# EAGLE board OpenLog_Panel_v15 (EAGLE 7.5.0), part 1 of 7
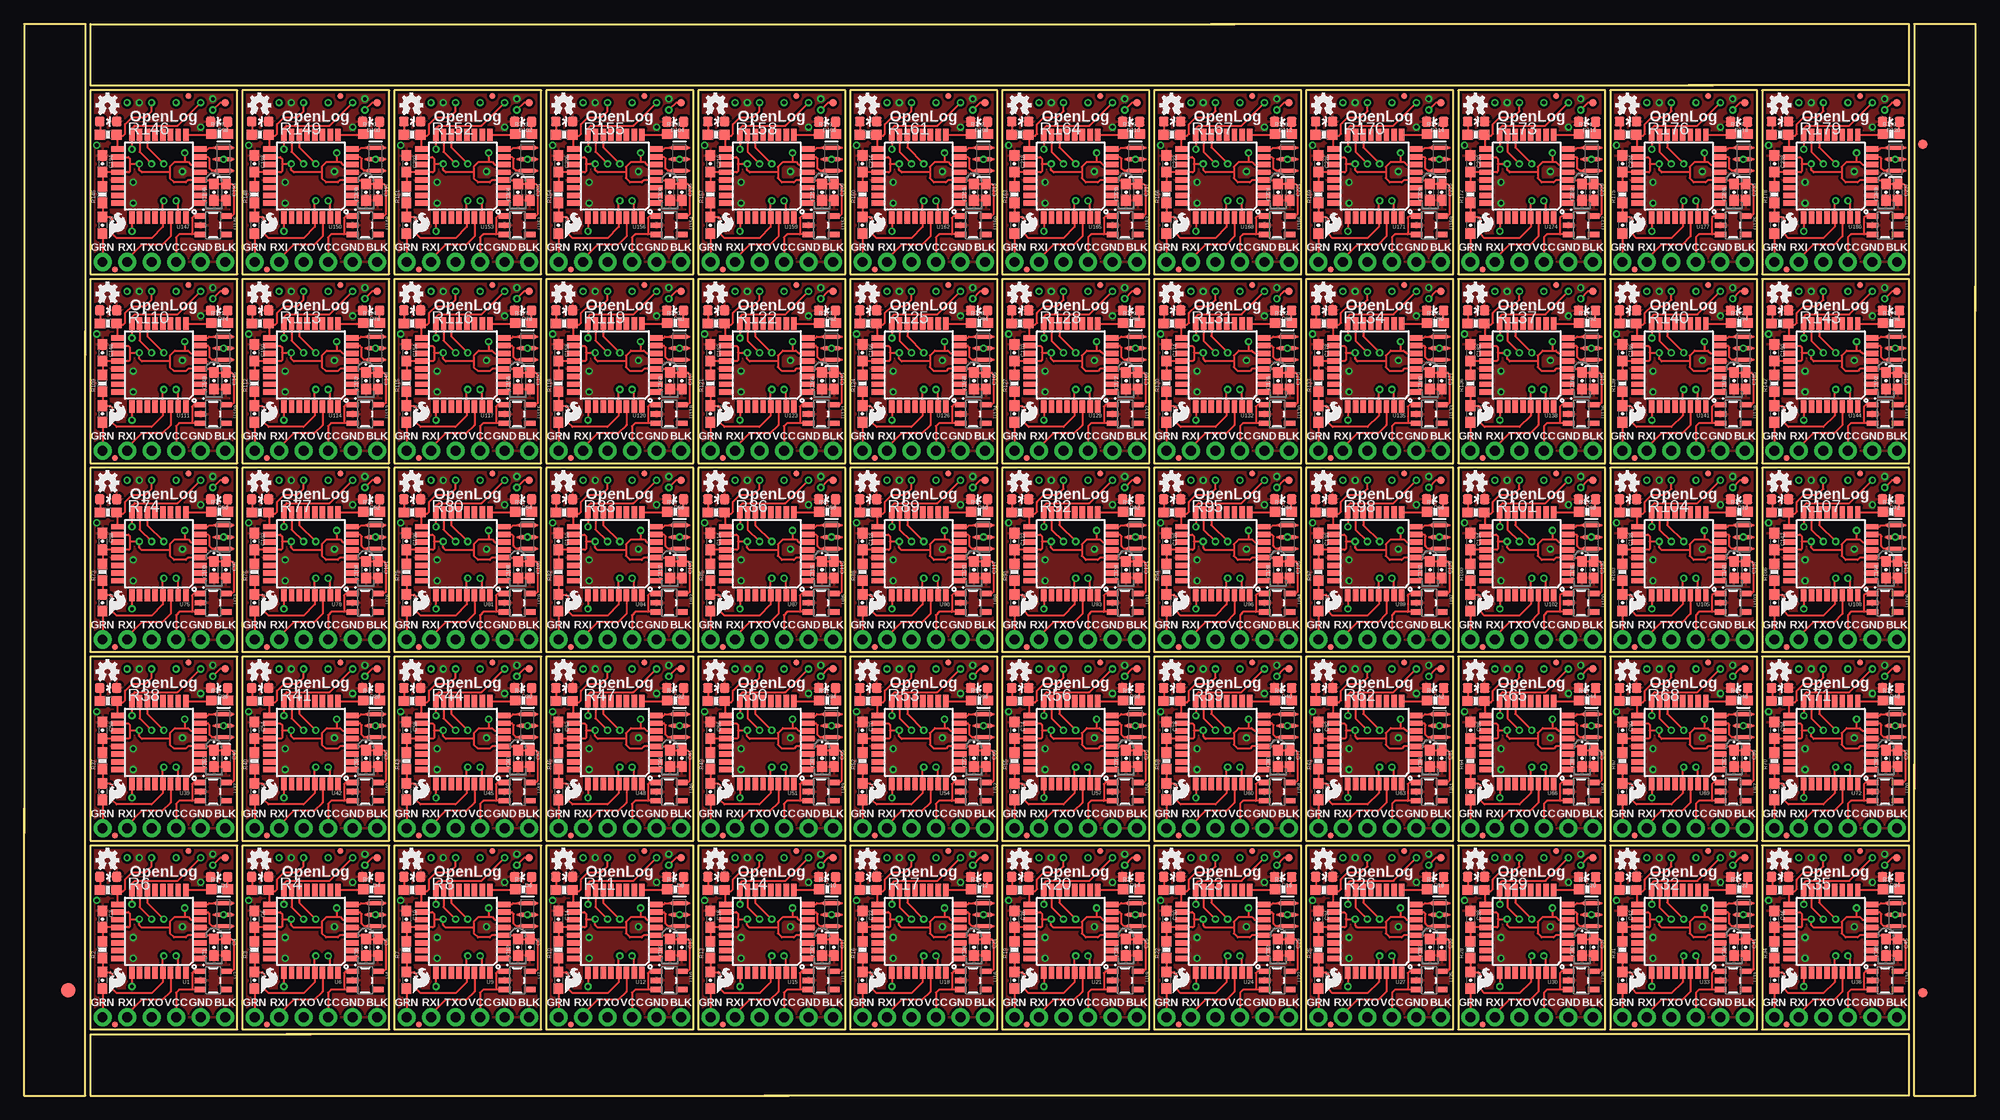
[diagram p0: board, top side]
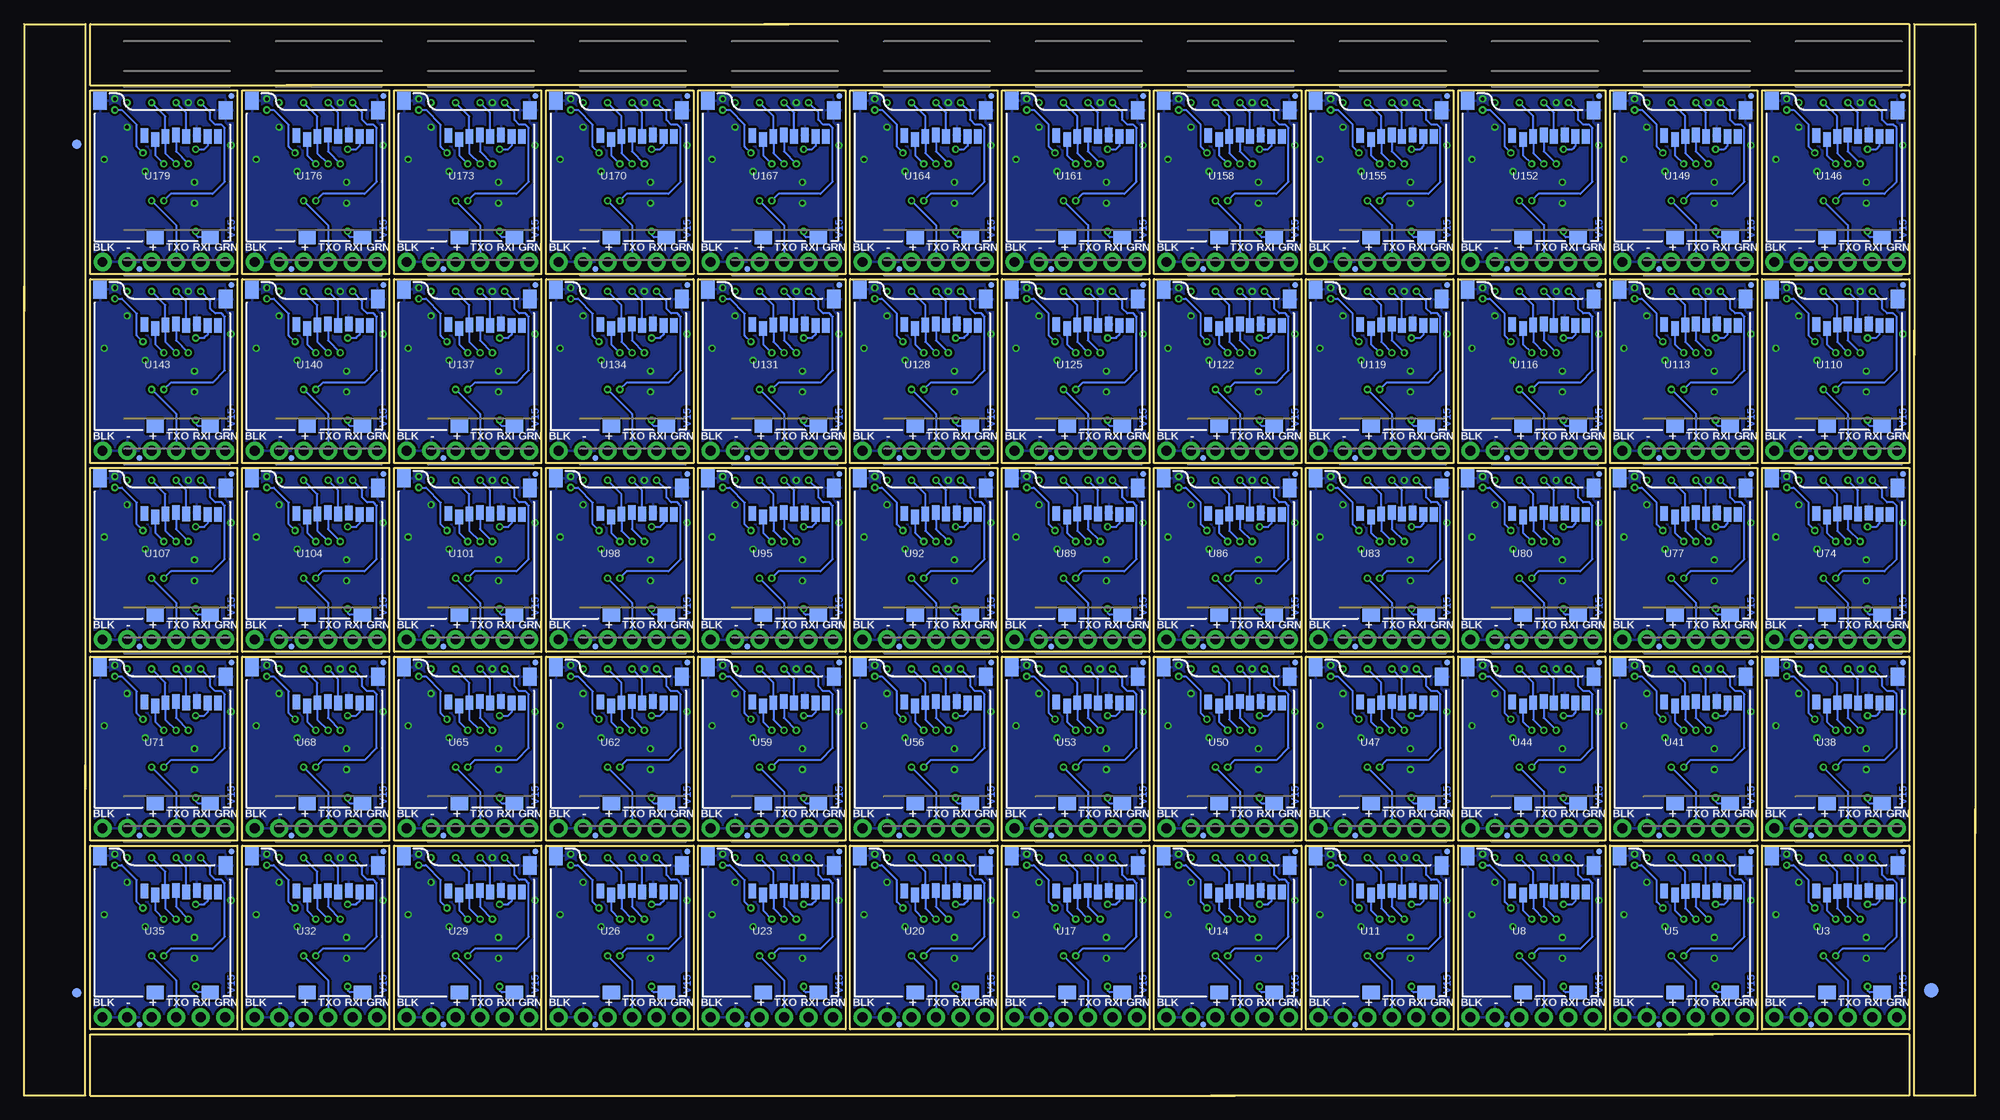
[diagram p1: board, bottom side, seen from below]

Size 202.18 x 111 mm. Coordinates in mm from the lower left corner, seen from the top.
Outline: 264 segments
Copper layers (1*16): Top 0.035mm / dielectric 1.5mm / Bottom 0.035mm
Design rules "SparkFun-2-layer-TIGHT": minimum track width 7mil, minimum drill 15mil, track to track 7mil, track to pad 7mil, pad to pad 7mil, via to via 7mil, smd to smd 7mil, copper to edge 7mil, drill to drill 7mil, minimum pad ring 7mil, minimum via ring 7mil, stop-mask expansion 4mil, vias tented up to drill 20mil, thermal gap 10mil
Net classes: 0 default: width 0.178 mm; 1 vcc: width 0.203 mm

## Footprints (pad centres in the part's own frame; a part is rotated, then mirrored left to right if it is on the bottom)
0603-POL = smd 1.1 x 1: A 0.85,0; K -0.85,0
0603-CAP = smd 1.1 x 1: 1 -0.85,0; 2 0.85,0
LED-0603 = smd 1 x 1: A 0,-0.877; C 0,0.877
FIDUCIAL-1.5X3 = smd 1.5 x 1.5: 1 0,0
FIDUCIAL-1X2 = smd 1 x 1: 1 0,0
MICRO-FIDUCIAL = smd 0.635 x 0.635: 1 0,0
1X06_NO_SILK = drill 1.016 pad 1.88: 1 0,0; 2 2.54,0; 3 5.08,0; 4 7.62,0; 5 10.16,0; 6 12.7,0
RESONATOR-SMD = smd 0.45 x 1.905: 1 -1.2,0; 2 0,0; 3 1.2,0
0603-RES = smd 1.1 x 1: 1 -0.85,0; 2 0.85,0
PAD.03X.03 = smd 0.762 x 0.762: P$1 0,0
TQFP32-08 = smd 1.27 x 0.559: 1 -4.293,2.8; 2 -4.293,2; 3 -4.293,1.2; 4 -4.293,0.4; 5 -4.293,-0.4; 6 -4.293,-1.2; 7 -4.293,-2; 8 -4.293,-2.8; 17 4.293,-2.8; 18 4.293,-2; 19 4.293,-1.2; 20 4.293,-0.4; 21 4.293,0.4; 22 4.293,1.2; 23 4.293,2; 24 4.293,2.8 | smd 0.559 x 1.27: 9 -2.8,-4.293; 10 -2,-4.293; 11 -1.2,-4.293; 12 -0.4,-4.293; 13 0.4,-4.293; 14 1.2,-4.293; 15 2,-4.293; 16 2.8,-4.293; 25 2.8,4.293; 26 2,4.293; 27 1.2,4.293; 28 0.4,4.293; 29 -0.4,4.293; 30 -1.2,4.293; 31 -2,4.293; 32 -2.8,4.293
SOT23-5 = smd 0.55 x 1.2: 1 -0.95,-1.3; 2 0,-1.3; 3 0.95,-1.3; 4 0.95,1.3; 5 -0.95,1.3
MICROSD_1:1 = smd 0.8 x 1.5: 1 5.096,10.919; 2 6.218,10.519; 3 7.274,10.853; 4 8.367,10.982; 5 9.421,10.828; 6 10.539,10.973; 7 11.648,10.819; 8 12.721,10.819 | smd 1.8 x 1.4: CD1 11.92,0.4; CD2 6.22,0.4 | smd 1.4 x 1.9: GND1 0.497,14.55; GND3 13.52,13.55

## Placement (x,y rotation side)
C1  10uF  [0603-POL]  19.68,15.37 90 top
C2  0.1uF  [0603-CAP]  8.13,11.94 270 top
C3  0.1uF  [0603-CAP]  8.13,18.29 270 top
C4  0.1uF  [0603-CAP]  20.9,15.37 270 top
C5  0.1uF  [0603-CAP]  36.65,15.37 270 top
C6  0.1uF  [0603-CAP]  23.88,18.29 270 top
C7  0.1uF  [0603-CAP]  23.88,11.94 270 top
C8  10uF  [0603-POL]  35.43,15.37 90 top
C9  0.1uF  [0603-CAP]  52.4,15.37 270 top
C10  0.1uF  [0603-CAP]  39.62,18.29 270 top
C11  0.1uF  [0603-CAP]  39.62,11.94 270 top
C12  10uF  [0603-POL]  51.18,15.37 90 top
C13  0.1uF  [0603-CAP]  68.15,15.37 270 top
C14  0.1uF  [0603-CAP]  55.37,18.29 270 top
C15  0.1uF  [0603-CAP]  55.37,11.94 270 top
C16  10uF  [0603-POL]  66.93,15.37 90 top
C17  0.1uF  [0603-CAP]  83.9,15.37 270 top
C18  0.1uF  [0603-CAP]  71.12,18.29 270 top
C19  0.1uF  [0603-CAP]  71.12,11.94 270 top
C20  10uF  [0603-POL]  82.68,15.37 90 top
C21  0.1uF  [0603-CAP]  99.64,15.37 270 top
C22  0.1uF  [0603-CAP]  86.87,18.29 270 top
C23  0.1uF  [0603-CAP]  86.87,11.94 270 top
C24  10uF  [0603-POL]  98.42,15.37 90 top
C25  0.1uF  [0603-CAP]  115.39,15.37 270 top
C26  0.1uF  [0603-CAP]  102.62,18.29 270 top
C27  0.1uF  [0603-CAP]  102.62,11.94 270 top
C28  10uF  [0603-POL]  114.17,15.37 90 top
C29  0.1uF  [0603-CAP]  131.14,15.37 270 top
C30  0.1uF  [0603-CAP]  118.36,18.29 270 top
C31  0.1uF  [0603-CAP]  118.36,11.94 270 top
C32  10uF  [0603-POL]  129.92,15.37 90 top
C33  0.1uF  [0603-CAP]  146.89,15.37 270 top
C34  0.1uF  [0603-CAP]  134.11,18.29 270 top
C35  0.1uF  [0603-CAP]  134.11,11.94 270 top
C36  10uF  [0603-POL]  145.67,15.37 90 top
C37  0.1uF  [0603-CAP]  162.64,15.37 270 top
C38  0.1uF  [0603-CAP]  149.86,18.29 270 top
C39  0.1uF  [0603-CAP]  149.86,11.94 270 top
C40  10uF  [0603-POL]  161.42,15.37 90 top
C41  0.1uF  [0603-CAP]  178.38,15.37 270 top
C42  0.1uF  [0603-CAP]  165.61,18.29 270 top
C43  0.1uF  [0603-CAP]  165.61,11.94 270 top
C44  10uF  [0603-POL]  177.16,15.37 90 top
C45  0.1uF  [0603-CAP]  194.13,15.37 270 top
C46  0.1uF  [0603-CAP]  181.36,18.29 270 top
C47  0.1uF  [0603-CAP]  181.36,11.94 270 top
C48  10uF  [0603-POL]  192.91,15.37 90 top
C49  0.1uF  [0603-CAP]  20.9,34.92 270 top
C50  0.1uF  [0603-CAP]  8.13,37.85 270 top
C51  0.1uF  [0603-CAP]  8.13,31.5 270 top
C52  10uF  [0603-POL]  19.68,34.92 90 top
C53  0.1uF  [0603-CAP]  36.65,34.92 270 top
C54  0.1uF  [0603-CAP]  23.88,37.85 270 top
C55  0.1uF  [0603-CAP]  23.88,31.5 270 top
C56  10uF  [0603-POL]  35.43,34.92 90 top
C57  0.1uF  [0603-CAP]  52.4,34.92 270 top
C58  0.1uF  [0603-CAP]  39.62,37.85 270 top
C59  0.1uF  [0603-CAP]  39.62,31.5 270 top
C60  10uF  [0603-POL]  51.18,34.92 90 top
C61  0.1uF  [0603-CAP]  68.15,34.92 270 top
C62  0.1uF  [0603-CAP]  55.37,37.85 270 top
C63  0.1uF  [0603-CAP]  55.37,31.5 270 top
C64  10uF  [0603-POL]  66.93,34.92 90 top
C65  0.1uF  [0603-CAP]  83.9,34.92 270 top
C66  0.1uF  [0603-CAP]  71.12,37.85 270 top
C67  0.1uF  [0603-CAP]  71.12,31.5 270 top
C68  10uF  [0603-POL]  82.68,34.92 90 top
C69  0.1uF  [0603-CAP]  99.64,34.92 270 top
C70  0.1uF  [0603-CAP]  86.87,37.85 270 top
C71  0.1uF  [0603-CAP]  86.87,31.5 270 top
C72  10uF  [0603-POL]  98.42,34.92 90 top
C73  0.1uF  [0603-CAP]  115.39,34.92 270 top
C74  0.1uF  [0603-CAP]  102.62,37.85 270 top
C75  0.1uF  [0603-CAP]  102.62,31.5 270 top
C76  10uF  [0603-POL]  114.17,34.92 90 top
C77  0.1uF  [0603-CAP]  131.14,34.92 270 top
C78  0.1uF  [0603-CAP]  118.36,37.85 270 top
C79  0.1uF  [0603-CAP]  118.36,31.5 270 top
C80  10uF  [0603-POL]  129.92,34.92 90 top
C81  0.1uF  [0603-CAP]  146.89,34.92 270 top
C82  0.1uF  [0603-CAP]  134.11,37.85 270 top
C83  0.1uF  [0603-CAP]  134.11,31.5 270 top
C84  10uF  [0603-POL]  145.67,34.92 90 top
C85  0.1uF  [0603-CAP]  162.64,34.92 270 top
C86  0.1uF  [0603-CAP]  149.86,37.85 270 top
C87  0.1uF  [0603-CAP]  149.86,31.5 270 top
C88  10uF  [0603-POL]  161.42,34.92 90 top
C89  0.1uF  [0603-CAP]  178.38,34.92 270 top
C90  0.1uF  [0603-CAP]  165.61,37.85 270 top
C91  0.1uF  [0603-CAP]  165.61,31.5 270 top
C92  10uF  [0603-POL]  177.16,34.92 90 top
C93  0.1uF  [0603-CAP]  194.13,34.92 270 top
C94  0.1uF  [0603-CAP]  181.36,37.85 270 top
C95  0.1uF  [0603-CAP]  181.36,31.5 270 top
C96  10uF  [0603-POL]  192.91,34.92 90 top
C97  0.1uF  [0603-CAP]  20.9,54.48 270 top
C98  0.1uF  [0603-CAP]  8.13,57.4 270 top
C99  0.1uF  [0603-CAP]  8.13,51.05 270 top
C100  10uF  [0603-POL]  19.68,54.48 90 top
C101  0.1uF  [0603-CAP]  36.65,54.48 270 top
C102  0.1uF  [0603-CAP]  23.88,57.4 270 top
C103  0.1uF  [0603-CAP]  23.88,51.05 270 top
C104  10uF  [0603-POL]  35.43,54.48 90 top
C105  0.1uF  [0603-CAP]  52.4,54.48 270 top
C106  0.1uF  [0603-CAP]  39.62,57.4 270 top
C107  0.1uF  [0603-CAP]  39.62,51.05 270 top
C108  10uF  [0603-POL]  51.18,54.48 90 top
C109  0.1uF  [0603-CAP]  68.15,54.48 270 top
C110  0.1uF  [0603-CAP]  55.37,57.4 270 top
C111  0.1uF  [0603-CAP]  55.37,51.05 270 top
C112  10uF  [0603-POL]  66.93,54.48 90 top
C113  0.1uF  [0603-CAP]  83.9,54.48 270 top
C114  0.1uF  [0603-CAP]  71.12,57.4 270 top
C115  0.1uF  [0603-CAP]  71.12,51.05 270 top
C116  10uF  [0603-POL]  82.68,54.48 90 top
C117  0.1uF  [0603-CAP]  99.64,54.48 270 top
C118  0.1uF  [0603-CAP]  86.87,57.4 270 top
C119  0.1uF  [0603-CAP]  86.87,51.05 270 top
C120  10uF  [0603-POL]  98.42,54.48 90 top
C121  0.1uF  [0603-CAP]  115.39,54.48 270 top
C122  0.1uF  [0603-CAP]  102.62,57.4 270 top
C123  0.1uF  [0603-CAP]  102.62,51.05 270 top
C124  10uF  [0603-POL]  114.17,54.48 90 top
C125  0.1uF  [0603-CAP]  131.14,54.48 270 top
C126  0.1uF  [0603-CAP]  118.36,57.4 270 top
C127  0.1uF  [0603-CAP]  118.36,51.05 270 top
C128  10uF  [0603-POL]  129.92,54.48 90 top
C129  0.1uF  [0603-CAP]  146.89,54.48 270 top
C130  0.1uF  [0603-CAP]  134.11,57.4 270 top
C131  0.1uF  [0603-CAP]  134.11,51.05 270 top
C132  10uF  [0603-POL]  145.67,54.48 90 top
C133  0.1uF  [0603-CAP]  162.64,54.48 270 top
C134  0.1uF  [0603-CAP]  149.86,57.4 270 top
C135  0.1uF  [0603-CAP]  149.86,51.05 270 top
C136  10uF  [0603-POL]  161.42,54.48 90 top
C137  0.1uF  [0603-CAP]  178.38,54.48 270 top
C138  0.1uF  [0603-CAP]  165.61,57.4 270 top
C139  0.1uF  [0603-CAP]  165.61,51.05 270 top
C140  10uF  [0603-POL]  177.16,54.48 90 top
C141  0.1uF  [0603-CAP]  194.13,54.48 270 top
C142  0.1uF  [0603-CAP]  181.36,57.4 270 top
C143  0.1uF  [0603-CAP]  181.36,51.05 270 top
C144  10uF  [0603-POL]  192.91,54.48 90 top
C145  0.1uF  [0603-CAP]  20.9,74.04 270 top
C146  0.1uF  [0603-CAP]  8.13,76.96 270 top
C147  0.1uF  [0603-CAP]  8.13,70.61 270 top
C148  10uF  [0603-POL]  19.68,74.04 90 top
C149  0.1uF  [0603-CAP]  36.65,74.04 270 top
C150  0.1uF  [0603-CAP]  23.88,76.96 270 top
C151  0.1uF  [0603-CAP]  23.88,70.61 270 top
C152  10uF  [0603-POL]  35.43,74.04 90 top
C153  0.1uF  [0603-CAP]  52.4,74.04 270 top
C154  0.1uF  [0603-CAP]  39.62,76.96 270 top
C155  0.1uF  [0603-CAP]  39.62,70.61 270 top
C156  10uF  [0603-POL]  51.18,74.04 90 top
C157  0.1uF  [0603-CAP]  68.15,74.04 270 top
C158  0.1uF  [0603-CAP]  55.37,76.96 270 top
C159  0.1uF  [0603-CAP]  55.37,70.61 270 top
C160  10uF  [0603-POL]  66.93,74.04 90 top
C161  0.1uF  [0603-CAP]  83.9,74.04 270 top
C162  0.1uF  [0603-CAP]  71.12,76.96 270 top
C163  0.1uF  [0603-CAP]  71.12,70.61 270 top
C164  10uF  [0603-POL]  82.68,74.04 90 top
C165  0.1uF  [0603-CAP]  99.64,74.04 270 top
C166  0.1uF  [0603-CAP]  86.87,76.96 270 top
C167  0.1uF  [0603-CAP]  86.87,70.61 270 top
C168  10uF  [0603-POL]  98.42,74.04 90 top
C169  0.1uF  [0603-CAP]  115.39,74.04 270 top
C170  0.1uF  [0603-CAP]  102.62,76.96 270 top
C171  0.1uF  [0603-CAP]  102.62,70.61 270 top
C172  10uF  [0603-POL]  114.17,74.04 90 top
C173  0.1uF  [0603-CAP]  131.14,74.04 270 top
C174  0.1uF  [0603-CAP]  118.36,76.96 270 top
C175  0.1uF  [0603-CAP]  118.36,70.61 270 top
C176  10uF  [0603-POL]  129.92,74.04 90 top
C177  0.1uF  [0603-CAP]  146.89,74.04 270 top
C178  0.1uF  [0603-CAP]  134.11,76.96 270 top
C179  0.1uF  [0603-CAP]  134.11,70.61 270 top
C180  10uF  [0603-POL]  145.67,74.04 90 top
C181  0.1uF  [0603-CAP]  162.64,74.04 270 top
C182  0.1uF  [0603-CAP]  149.86,76.96 270 top
C183  0.1uF  [0603-CAP]  149.86,70.61 270 top
C184  10uF  [0603-POL]  161.42,74.04 90 top
C185  0.1uF  [0603-CAP]  178.38,74.04 270 top
C186  0.1uF  [0603-CAP]  165.61,76.96 270 top
C187  0.1uF  [0603-CAP]  165.61,70.61 270 top
C188  10uF  [0603-POL]  177.16,74.04 90 top
C189  0.1uF  [0603-CAP]  194.13,74.04 270 top
C190  0.1uF  [0603-CAP]  181.36,76.96 270 top
C191  0.1uF  [0603-CAP]  181.36,70.61 270 top
C192  10uF  [0603-POL]  192.91,74.04 90 top
C193  0.1uF  [0603-CAP]  20.9,93.6 270 top
C194  0.1uF  [0603-CAP]  8.13,96.52 270 top
C195  0.1uF  [0603-CAP]  8.13,90.17 270 top
C196  10uF  [0603-POL]  19.68,93.6 90 top
C197  0.1uF  [0603-CAP]  36.65,93.6 270 top
C198  0.1uF  [0603-CAP]  23.88,96.52 270 top
C199  0.1uF  [0603-CAP]  23.88,90.17 270 top
C200  10uF  [0603-POL]  35.43,93.6 90 top
C201  0.1uF  [0603-CAP]  52.4,93.6 270 top
C202  0.1uF  [0603-CAP]  39.62,96.52 270 top
C203  0.1uF  [0603-CAP]  39.62,90.17 270 top
C204  10uF  [0603-POL]  51.18,93.6 90 top
C205  0.1uF  [0603-CAP]  68.15,93.6 270 top
C206  0.1uF  [0603-CAP]  55.37,96.52 270 top
C207  0.1uF  [0603-CAP]  55.37,90.17 270 top
C208  10uF  [0603-POL]  66.93,93.6 90 top
C209  0.1uF  [0603-CAP]  83.9,93.6 270 top
C210  0.1uF  [0603-CAP]  71.12,96.52 270 top
C211  0.1uF  [0603-CAP]  71.12,90.17 270 top
C212  10uF  [0603-POL]  82.68,93.6 90 top
C213  0.1uF  [0603-CAP]  99.64,93.6 270 top
C214  0.1uF  [0603-CAP]  86.87,96.52 270 top
C215  0.1uF  [0603-CAP]  86.87,90.17 270 top
C216  10uF  [0603-POL]  98.42,93.6 90 top
C217  0.1uF  [0603-CAP]  115.39,93.6 270 top
C218  0.1uF  [0603-CAP]  102.62,96.52 270 top
C219  0.1uF  [0603-CAP]  102.62,90.17 270 top
C220  10uF  [0603-POL]  114.17,93.6 90 top
C221  0.1uF  [0603-CAP]  131.14,93.6 270 top
C222  0.1uF  [0603-CAP]  118.36,96.52 270 top
C223  0.1uF  [0603-CAP]  118.36,90.17 270 top
C224  10uF  [0603-POL]  129.92,93.6 90 top
C225  0.1uF  [0603-CAP]  146.89,93.6 270 top
C226  0.1uF  [0603-CAP]  134.11,96.52 270 top
C227  0.1uF  [0603-CAP]  134.11,90.17 270 top
C228  10uF  [0603-POL]  145.67,93.6 90 top
C229  0.1uF  [0603-CAP]  162.64,93.6 270 top
C230  0.1uF  [0603-CAP]  149.86,96.52 270 top
C231  0.1uF  [0603-CAP]  149.86,90.17 270 top
C232  10uF  [0603-POL]  161.42,93.6 90 top
C233  0.1uF  [0603-CAP]  178.38,93.6 270 top
C234  0.1uF  [0603-CAP]  165.61,96.52 270 top
C235  0.1uF  [0603-CAP]  165.61,90.17 270 top
C236  10uF  [0603-POL]  177.16,93.6 90 top
C237  0.1uF  [0603-CAP]  194.13,93.6 270 top
C238  0.1uF  [0603-CAP]  181.36,96.52 270 top
C239  0.1uF  [0603-CAP]  181.36,90.17 270 top
C240  10uF  [0603-POL]  192.91,93.6 90 top
D1  BLUE  [LED-0603]  20.22,22.66 90 top
D2  GREEN  [LED-0603]  24.47,22.67 270 top
D3  GREEN  [LED-0603]  8.72,22.67 270 top
D4  BLUE  [LED-0603]  35.97,22.66 90 top
D5  GREEN  [LED-0603]  40.22,22.67 270 top
D6  BLUE  [LED-0603]  51.71,22.66 90 top
D7  GREEN  [LED-0603]  55.96,22.67 270 top
D8  BLUE  [LED-0603]  67.46,22.66 90 top
D9  GREEN  [LED-0603]  71.71,22.67 270 top
D10  BLUE  [LED-0603]  83.21,22.66 90 top
D11  GREEN  [LED-0603]  87.46,22.67 270 top
D12  BLUE  [LED-0603]  98.96,22.66 90 top
D13  GREEN  [LED-0603]  103.21,22.67 270 top
D14  BLUE  [LED-0603]  114.71,22.66 90 top
D15  GREEN  [LED-0603]  118.96,22.67 270 top
D16  BLUE  [LED-0603]  130.45,22.66 90 top
D17  GREEN  [LED-0603]  134.7,22.67 270 top
D18  BLUE  [LED-0603]  146.2,22.66 90 top
D19  GREEN  [LED-0603]  150.45,22.67 270 top
D20  BLUE  [LED-0603]  161.95,22.66 90 top
D21  GREEN  [LED-0603]  166.2,22.67 270 top
D22  BLUE  [LED-0603]  177.7,22.66 90 top
D23  GREEN  [LED-0603]  181.95,22.67 270 top
D24  BLUE  [LED-0603]  193.45,22.66 90 top
D25  GREEN  [LED-0603]  8.72,42.23 270 top
D26  BLUE  [LED-0603]  20.22,42.21 90 top
D27  GREEN  [LED-0603]  24.47,42.23 270 top
D28  BLUE  [LED-0603]  35.97,42.21 90 top
D29  GREEN  [LED-0603]  40.22,42.23 270 top
D30  BLUE  [LED-0603]  51.71,42.21 90 top
D31  GREEN  [LED-0603]  55.96,42.23 270 top
D32  BLUE  [LED-0603]  67.46,42.21 90 top
D33  GREEN  [LED-0603]  71.71,42.23 270 top
D34  BLUE  [LED-0603]  83.21,42.21 90 top
D35  GREEN  [LED-0603]  87.46,42.23 270 top
D36  BLUE  [LED-0603]  98.96,42.21 90 top
D37  GREEN  [LED-0603]  103.21,42.23 270 top
D38  BLUE  [LED-0603]  114.71,42.21 90 top
D39  GREEN  [LED-0603]  118.96,42.23 270 top
D40  BLUE  [LED-0603]  130.45,42.21 90 top
D41  GREEN  [LED-0603]  134.7,42.23 270 top
D42  BLUE  [LED-0603]  146.2,42.21 90 top
D43  GREEN  [LED-0603]  150.45,42.23 270 top
D44  BLUE  [LED-0603]  161.95,42.21 90 top
D45  GREEN  [LED-0603]  166.2,42.23 270 top
D46  BLUE  [LED-0603]  177.7,42.21 90 top
D47  GREEN  [LED-0603]  181.95,42.23 270 top
D48  BLUE  [LED-0603]  193.45,42.21 90 top
D49  GREEN  [LED-0603]  8.72,61.79 270 top
D50  BLUE  [LED-0603]  20.22,61.77 90 top
D51  GREEN  [LED-0603]  24.47,61.79 270 top
D52  BLUE  [LED-0603]  35.97,61.77 90 top
D53  GREEN  [LED-0603]  40.22,61.79 270 top
D54  BLUE  [LED-0603]  51.71,61.77 90 top
D55  GREEN  [LED-0603]  55.96,61.79 270 top
D56  BLUE  [LED-0603]  67.46,61.77 90 top
D57  GREEN  [LED-0603]  71.71,61.79 270 top
D58  BLUE  [LED-0603]  83.21,61.77 90 top
D59  GREEN  [LED-0603]  87.46,61.79 270 top
D60  BLUE  [LED-0603]  98.96,61.77 90 top
D61  GREEN  [LED-0603]  103.21,61.79 270 top
D62  BLUE  [LED-0603]  114.71,61.77 90 top
D63  GREEN  [LED-0603]  118.96,61.79 270 top
D64  BLUE  [LED-0603]  130.45,61.77 90 top
D65  GREEN  [LED-0603]  134.7,61.79 270 top
D66  BLUE  [LED-0603]  146.2,61.77 90 top
D67  GREEN  [LED-0603]  150.45,61.79 270 top
D68  BLUE  [LED-0603]  161.95,61.77 90 top
D69  GREEN  [LED-0603]  166.2,61.79 270 top
D70  BLUE  [LED-0603]  177.7,61.77 90 top
D71  GREEN  [LED-0603]  181.95,61.79 270 top
D72  BLUE  [LED-0603]  193.45,61.77 90 top
D73  GREEN  [LED-0603]  8.72,81.35 270 top
D74  BLUE  [LED-0603]  20.22,81.33 90 top
D75  GREEN  [LED-0603]  24.47,81.35 270 top
D76  BLUE  [LED-0603]  35.97,81.33 90 top
D77  GREEN  [LED-0603]  40.22,81.35 270 top
D78  BLUE  [LED-0603]  51.71,81.33 90 top
D79  GREEN  [LED-0603]  55.96,81.35 270 top
D80  BLUE  [LED-0603]  67.46,81.33 90 top
D81  GREEN  [LED-0603]  71.71,81.35 270 top
D82  BLUE  [LED-0603]  83.21,81.33 90 top
D83  GREEN  [LED-0603]  87.46,81.35 270 top
D84  BLUE  [LED-0603]  98.96,81.33 90 top
D85  GREEN  [LED-0603]  103.21,81.35 270 top
D86  BLUE  [LED-0603]  114.71,81.33 90 top
D87  GREEN  [LED-0603]  118.96,81.35 270 top
D88  BLUE  [LED-0603]  130.45,81.33 90 top
D89  GREEN  [LED-0603]  134.7,81.35 270 top
D90  BLUE  [LED-0603]  146.2,81.33 90 top
D91  GREEN  [LED-0603]  150.45,81.35 270 top
D92  BLUE  [LED-0603]  161.95,81.33 90 top
D93  GREEN  [LED-0603]  166.2,81.35 270 top
D94  BLUE  [LED-0603]  177.7,81.33 90 top
D95  GREEN  [LED-0603]  181.95,81.35 270 top
D96  BLUE  [LED-0603]  193.45,81.33 90 top
D97  GREEN  [LED-0603]  8.72,100.9 270 top
D98  BLUE  [LED-0603]  20.22,100.89 90 top
D99  GREEN  [LED-0603]  24.47,100.9 270 top
D100  BLUE  [LED-0603]  35.97,100.89 90 top
D101  GREEN  [LED-0603]  40.22,100.9 270 top
D102  BLUE  [LED-0603]  51.71,100.89 90 top
D103  GREEN  [LED-0603]  55.96,100.9 270 top
D104  BLUE  [LED-0603]  67.46,100.89 90 top
D105  GREEN  [LED-0603]  71.71,100.9 270 top
D106  BLUE  [LED-0603]  83.21,100.89 90 top
D107  GREEN  [LED-0603]  87.46,100.9 270 top
D108  BLUE  [LED-0603]  98.96,100.89 90 top
D109  GREEN  [LED-0603]  103.21,100.9 270 top
D110  BLUE  [LED-0603]  114.71,100.89 90 top
D111  GREEN  [LED-0603]  118.96,100.9 270 top
D112  BLUE  [LED-0603]  130.45,100.89 90 top
D113  GREEN  [LED-0603]  134.7,100.9 270 top
D114  BLUE  [LED-0603]  146.2,100.89 90 top
D115  GREEN  [LED-0603]  150.45,100.9 270 top
D116  BLUE  [LED-0603]  161.95,100.89 90 top
D117  GREEN  [LED-0603]  166.2,100.9 270 top
D118  BLUE  [LED-0603]  177.7,100.89 90 top
D119  GREEN  [LED-0603]  181.95,100.9 270 top
D120  BLUE  [LED-0603]  193.45,100.89 90 top
E$1  [FIDUCIAL-1.5X3]  4.57,10.92 0 top
E$2  [FIDUCIAL-1.5X3]  4.57,10.92 0 bottom
E$3  [FIDUCIAL-1X2]  196.72,10.67 0 bottom
E$4  [FIDUCIAL-1X2]  196.72,98.55 180 bottom
E$7  [FIDUCIAL-1X2]  196.72,98.55 180 top
E$8  [FIDUCIAL-1X2]  196.72,10.67 0 top
FID1  FIDUCIALUFIDUCIAL  [MICRO-FIDUCIAL]  17.02,25.32 0 top
FID2  FIDUCIALUFIDUCIAL  [MICRO-FIDUCIAL]  9.4,7.37 0 top
FID3  FIDUCIALUFIDUCIAL  [MICRO-FIDUCIAL]  17.02,7.39 0 bottom
FID4  FIDUCIALUFIDUCIAL  [MICRO-FIDUCIAL]  7.49,25.3 0 bottom
FID5  FIDUCIALUFIDUCIAL  [MICRO-FIDUCIAL]  32.77,25.32 0 top
FID6  FIDUCIALUFIDUCIAL  [MICRO-FIDUCIAL]  25.15,7.37 0 top
FID7  FIDUCIALUFIDUCIAL  [MICRO-FIDUCIAL]  32.77,7.39 0 bottom
FID8  FIDUCIALUFIDUCIAL  [MICRO-FIDUCIAL]  23.24,25.3 0 bottom
FID9  FIDUCIALUFIDUCIAL  [MICRO-FIDUCIAL]  48.51,25.32 0 top
FID10  FIDUCIALUFIDUCIAL  [MICRO-FIDUCIAL]  40.89,7.37 0 top
FID11  FIDUCIALUFIDUCIAL  [MICRO-FIDUCIAL]  48.51,7.39 0 bottom
FID12  FIDUCIALUFIDUCIAL  [MICRO-FIDUCIAL]  38.99,25.3 0 bottom
FID13  FIDUCIALUFIDUCIAL  [MICRO-FIDUCIAL]  64.26,25.32 0 top
FID14  FIDUCIALUFIDUCIAL  [MICRO-FIDUCIAL]  56.64,7.37 0 top
FID15  FIDUCIALUFIDUCIAL  [MICRO-FIDUCIAL]  64.26,7.39 0 bottom
FID16  FIDUCIALUFIDUCIAL  [MICRO-FIDUCIAL]  54.74,25.3 0 bottom
FID17  FIDUCIALUFIDUCIAL  [MICRO-FIDUCIAL]  80.01,25.32 0 top
FID18  FIDUCIALUFIDUCIAL  [MICRO-FIDUCIAL]  72.39,7.37 0 top
FID19  FIDUCIALUFIDUCIAL  [MICRO-FIDUCIAL]  80.01,7.39 0 bottom
FID20  FIDUCIALUFIDUCIAL  [MICRO-FIDUCIAL]  70.48,25.3 0 bottom
FID21  FIDUCIALUFIDUCIAL  [MICRO-FIDUCIAL]  95.76,25.32 0 top
FID22  FIDUCIALUFIDUCIAL  [MICRO-FIDUCIAL]  88.14,7.37 0 top
FID23  FIDUCIALUFIDUCIAL  [MICRO-FIDUCIAL]  95.76,7.39 0 bottom
FID24  FIDUCIALUFIDUCIAL  [MICRO-FIDUCIAL]  86.23,25.3 0 bottom
FID25  FIDUCIALUFIDUCIAL  [MICRO-FIDUCIAL]  111.51,25.32 0 top
FID26  FIDUCIALUFIDUCIAL  [MICRO-FIDUCIAL]  103.89,7.37 0 top
FID27  FIDUCIALUFIDUCIAL  [MICRO-FIDUCIAL]  111.51,7.39 0 bottom
FID28  FIDUCIALUFIDUCIAL  [MICRO-FIDUCIAL]  101.98,25.3 0 bottom
FID29  FIDUCIALUFIDUCIAL  [MICRO-FIDUCIAL]  127.25,25.32 0 top
FID30  FIDUCIALUFIDUCIAL  [MICRO-FIDUCIAL]  119.63,7.37 0 top
FID31  FIDUCIALUFIDUCIAL  [MICRO-FIDUCIAL]  127.25,7.39 0 bottom
FID32  FIDUCIALUFIDUCIAL  [MICRO-FIDUCIAL]  117.73,25.3 0 bottom
FID33  FIDUCIALUFIDUCIAL  [MICRO-FIDUCIAL]  143,25.32 0 top
FID34  FIDUCIALUFIDUCIAL  [MICRO-FIDUCIAL]  135.38,7.37 0 top
FID35  FIDUCIALUFIDUCIAL  [MICRO-FIDUCIAL]  143,7.39 0 bottom
FID36  FIDUCIALUFIDUCIAL  [MICRO-FIDUCIAL]  133.48,25.3 0 bottom
FID37  FIDUCIALUFIDUCIAL  [MICRO-FIDUCIAL]  158.75,25.32 0 top
FID38  FIDUCIALUFIDUCIAL  [MICRO-FIDUCIAL]  151.13,7.37 0 top
FID39  FIDUCIALUFIDUCIAL  [MICRO-FIDUCIAL]  158.75,7.39 0 bottom
FID40  FIDUCIALUFIDUCIAL  [MICRO-FIDUCIAL]  149.22,25.3 0 bottom
FID41  FIDUCIALUFIDUCIAL  [MICRO-FIDUCIAL]  174.5,25.32 0 top
FID42  FIDUCIALUFIDUCIAL  [MICRO-FIDUCIAL]  166.88,7.37 0 top
FID43  FIDUCIALUFIDUCIAL  [MICRO-FIDUCIAL]  174.5,7.39 0 bottom
FID44  FIDUCIALUFIDUCIAL  [MICRO-FIDUCIAL]  164.97,25.3 0 bottom
FID45  FIDUCIALUFIDUCIAL  [MICRO-FIDUCIAL]  190.25,25.32 0 top
FID46  FIDUCIALUFIDUCIAL  [MICRO-FIDUCIAL]  182.63,7.37 0 top
FID47  FIDUCIALUFIDUCIAL  [MICRO-FIDUCIAL]  190.25,7.39 0 bottom
FID48  FIDUCIALUFIDUCIAL  [MICRO-FIDUCIAL]  180.72,25.3 0 bottom
FID49  FIDUCIALUFIDUCIAL  [MICRO-FIDUCIAL]  17.02,44.88 0 top
FID50  FIDUCIALUFIDUCIAL  [MICRO-FIDUCIAL]  9.4,26.92 0 top
FID51  FIDUCIALUFIDUCIAL  [MICRO-FIDUCIAL]  17.02,26.95 0 bottom
FID52  FIDUCIALUFIDUCIAL  [MICRO-FIDUCIAL]  7.49,44.86 0 bottom
FID53  FIDUCIALUFIDUCIAL  [MICRO-FIDUCIAL]  32.77,44.88 0 top
FID54  FIDUCIALUFIDUCIAL  [MICRO-FIDUCIAL]  25.15,26.92 0 top
FID55  FIDUCIALUFIDUCIAL  [MICRO-FIDUCIAL]  32.77,26.95 0 bottom
FID56  FIDUCIALUFIDUCIAL  [MICRO-FIDUCIAL]  23.24,44.86 0 bottom
FID57  FIDUCIALUFIDUCIAL  [MICRO-FIDUCIAL]  48.51,44.88 0 top
FID58  FIDUCIALUFIDUCIAL  [MICRO-FIDUCIAL]  40.89,26.92 0 top
FID59  FIDUCIALUFIDUCIAL  [MICRO-FIDUCIAL]  48.51,26.95 0 bottom
FID60  FIDUCIALUFIDUCIAL  [MICRO-FIDUCIAL]  38.99,44.86 0 bottom
FID61  FIDUCIALUFIDUCIAL  [MICRO-FIDUCIAL]  64.26,44.88 0 top
FID62  FIDUCIALUFIDUCIAL  [MICRO-FIDUCIAL]  56.64,26.92 0 top
FID63  FIDUCIALUFIDUCIAL  [MICRO-FIDUCIAL]  64.26,26.95 0 bottom
FID64  FIDUCIALUFIDUCIAL  [MICRO-FIDUCIAL]  54.74,44.86 0 bottom
FID65  FIDUCIALUFIDUCIAL  [MICRO-FIDUCIAL]  80.01,44.88 0 top
FID66  FIDUCIALUFIDUCIAL  [MICRO-FIDUCIAL]  72.39,26.92 0 top
FID67  FIDUCIALUFIDUCIAL  [MICRO-FIDUCIAL]  80.01,26.95 0 bottom
FID68  FIDUCIALUFIDUCIAL  [MICRO-FIDUCIAL]  70.48,44.86 0 bottom
FID69  FIDUCIALUFIDUCIAL  [MICRO-FIDUCIAL]  95.76,44.88 0 top
FID70  FIDUCIALUFIDUCIAL  [MICRO-FIDUCIAL]  88.14,26.92 0 top
FID71  FIDUCIALUFIDUCIAL  [MICRO-FIDUCIAL]  95.76,26.95 0 bottom
FID72  FIDUCIALUFIDUCIAL  [MICRO-FIDUCIAL]  86.23,44.86 0 bottom
FID73  FIDUCIALUFIDUCIAL  [MICRO-FIDUCIAL]  111.51,44.88 0 top
FID74  FIDUCIALUFIDUCIAL  [MICRO-FIDUCIAL]  103.89,26.92 0 top
FID75  FIDUCIALUFIDUCIAL  [MICRO-FIDUCIAL]  111.51,26.95 0 bottom
FID76  FIDUCIALUFIDUCIAL  [MICRO-FIDUCIAL]  101.98,44.86 0 bottom
FID77  FIDUCIALUFIDUCIAL  [MICRO-FIDUCIAL]  127.25,44.88 0 top
FID78  FIDUCIALUFIDUCIAL  [MICRO-FIDUCIAL]  119.63,26.92 0 top
FID79  FIDUCIALUFIDUCIAL  [MICRO-FIDUCIAL]  127.25,26.95 0 bottom
FID80  FIDUCIALUFIDUCIAL  [MICRO-FIDUCIAL]  117.73,44.86 0 bottom
FID81  FIDUCIALUFIDUCIAL  [MICRO-FIDUCIAL]  143,44.88 0 top
FID82  FIDUCIALUFIDUCIAL  [MICRO-FIDUCIAL]  135.38,26.92 0 top
FID83  FIDUCIALUFIDUCIAL  [MICRO-FIDUCIAL]  143,26.95 0 bottom
FID84  FIDUCIALUFIDUCIAL  [MICRO-FIDUCIAL]  133.48,44.86 0 bottom
FID85  FIDUCIALUFIDUCIAL  [MICRO-FIDUCIAL]  158.75,44.88 0 top
FID86  FIDUCIALUFIDUCIAL  [MICRO-FIDUCIAL]  151.13,26.92 0 top
FID87  FIDUCIALUFIDUCIAL  [MICRO-FIDUCIAL]  158.75,26.95 0 bottom
FID88  FIDUCIALUFIDUCIAL  [MICRO-FIDUCIAL]  149.22,44.86 0 bottom
FID89  FIDUCIALUFIDUCIAL  [MICRO-FIDUCIAL]  174.5,44.88 0 top
FID90  FIDUCIALUFIDUCIAL  [MICRO-FIDUCIAL]  166.88,26.92 0 top
FID91  FIDUCIALUFIDUCIAL  [MICRO-FIDUCIAL]  174.5,26.95 0 bottom
FID92  FIDUCIALUFIDUCIAL  [MICRO-FIDUCIAL]  164.97,44.86 0 bottom
FID93  FIDUCIALUFIDUCIAL  [MICRO-FIDUCIAL]  190.25,44.88 0 top
FID94  FIDUCIALUFIDUCIAL  [MICRO-FIDUCIAL]  182.63,26.92 0 top
FID95  FIDUCIALUFIDUCIAL  [MICRO-FIDUCIAL]  190.25,26.95 0 bottom
FID96  FIDUCIALUFIDUCIAL  [MICRO-FIDUCIAL]  180.72,44.86 0 bottom
FID97  FIDUCIALUFIDUCIAL  [MICRO-FIDUCIAL]  17.02,64.44 0 top
FID98  FIDUCIALUFIDUCIAL  [MICRO-FIDUCIAL]  9.4,46.48 0 top
FID99  FIDUCIALUFIDUCIAL  [MICRO-FIDUCIAL]  17.02,46.51 0 bottom
FID100  FIDUCIALUFIDUCIAL  [MICRO-FIDUCIAL]  7.49,64.41 0 bottom
FID101  FIDUCIALUFIDUCIAL  [MICRO-FIDUCIAL]  32.77,64.44 0 top
FID102  FIDUCIALUFIDUCIAL  [MICRO-FIDUCIAL]  25.15,46.48 0 top
FID103  FIDUCIALUFIDUCIAL  [MICRO-FIDUCIAL]  32.77,46.51 0 bottom
FID104  FIDUCIALUFIDUCIAL  [MICRO-FIDUCIAL]  23.24,64.41 0 bottom
FID105  FIDUCIALUFIDUCIAL  [MICRO-FIDUCIAL]  48.51,64.44 0 top
FID106  FIDUCIALUFIDUCIAL  [MICRO-FIDUCIAL]  40.89,46.48 0 top
FID107  FIDUCIALUFIDUCIAL  [MICRO-FIDUCIAL]  48.51,46.51 0 bottom
FID108  FIDUCIALUFIDUCIAL  [MICRO-FIDUCIAL]  38.99,64.41 0 bottom
FID109  FIDUCIALUFIDUCIAL  [MICRO-FIDUCIAL]  64.26,64.44 0 top
FID110  FIDUCIALUFIDUCIAL  [MICRO-FIDUCIAL]  56.64,46.48 0 top
FID111  FIDUCIALUFIDUCIAL  [MICRO-FIDUCIAL]  64.26,46.51 0 bottom
FID112  FIDUCIALUFIDUCIAL  [MICRO-FIDUCIAL]  54.74,64.41 0 bottom
FID113  FIDUCIALUFIDUCIAL  [MICRO-FIDUCIAL]  80.01,64.44 0 top
FID114  FIDUCIALUFIDUCIAL  [MICRO-FIDUCIAL]  72.39,46.48 0 top
FID115  FIDUCIALUFIDUCIAL  [MICRO-FIDUCIAL]  80.01,46.51 0 bottom
FID116  FIDUCIALUFIDUCIAL  [MICRO-FIDUCIAL]  70.48,64.41 0 bottom
FID117  FIDUCIALUFIDUCIAL  [MICRO-FIDUCIAL]  95.76,64.44 0 top
FID118  FIDUCIALUFIDUCIAL  [MICRO-FIDUCIAL]  88.14,46.48 0 top
FID119  FIDUCIALUFIDUCIAL  [MICRO-FIDUCIAL]  95.76,46.51 0 bottom
FID120  FIDUCIALUFIDUCIAL  [MICRO-FIDUCIAL]  86.23,64.41 0 bottom
FID121  FIDUCIALUFIDUCIAL  [MICRO-FIDUCIAL]  111.51,64.44 0 top
FID122  FIDUCIALUFIDUCIAL  [MICRO-FIDUCIAL]  103.89,46.48 0 top
FID123  FIDUCIALUFIDUCIAL  [MICRO-FIDUCIAL]  111.51,46.51 0 bottom
FID124  FIDUCIALUFIDUCIAL  [MICRO-FIDUCIAL]  101.98,64.41 0 bottom
FID125  FIDUCIALUFIDUCIAL  [MICRO-FIDUCIAL]  127.25,64.44 0 top
FID126  FIDUCIALUFIDUCIAL  [MICRO-FIDUCIAL]  119.63,46.48 0 top
FID127  FIDUCIALUFIDUCIAL  [MICRO-FIDUCIAL]  127.25,46.51 0 bottom
FID128  FIDUCIALUFIDUCIAL  [MICRO-FIDUCIAL]  117.73,64.41 0 bottom
FID129  FIDUCIALUFIDUCIAL  [MICRO-FIDUCIAL]  143,64.44 0 top
FID130  FIDUCIALUFIDUCIAL  [MICRO-FIDUCIAL]  135.38,46.48 0 top
FID131  FIDUCIALUFIDUCIAL  [MICRO-FIDUCIAL]  143,46.51 0 bottom
FID132  FIDUCIALUFIDUCIAL  [MICRO-FIDUCIAL]  133.48,64.41 0 bottom
FID133  FIDUCIALUFIDUCIAL  [MICRO-FIDUCIAL]  158.75,64.44 0 top
FID134  FIDUCIALUFIDUCIAL  [MICRO-FIDUCIAL]  151.13,46.48 0 top
FID135  FIDUCIALUFIDUCIAL  [MICRO-FIDUCIAL]  158.75,46.51 0 bottom
FID136  FIDUCIALUFIDUCIAL  [MICRO-FIDUCIAL]  149.22,64.41 0 bottom
FID137  FIDUCIALUFIDUCIAL  [MICRO-FIDUCIAL]  174.5,64.44 0 top
FID138  FIDUCIALUFIDUCIAL  [MICRO-FIDUCIAL]  166.88,46.48 0 top
FID139  FIDUCIALUFIDUCIAL  [MICRO-FIDUCIAL]  174.5,46.51 0 bottom
FID140  FIDUCIALUFIDUCIAL  [MICRO-FIDUCIAL]  164.97,64.41 0 bottom
FID141  FIDUCIALUFIDUCIAL  [MICRO-FIDUCIAL]  190.25,64.44 0 top
FID142  FIDUCIALUFIDUCIAL  [MICRO-FIDUCIAL]  182.63,46.48 0 top
FID143  FIDUCIALUFIDUCIAL  [MICRO-FIDUCIAL]  190.25,46.51 0 bottom
FID144  FIDUCIALUFIDUCIAL  [MICRO-FIDUCIAL]  180.72,64.41 0 bottom
FID145  FIDUCIALUFIDUCIAL  [MICRO-FIDUCIAL]  17.02,84 0 top
FID146  FIDUCIALUFIDUCIAL  [MICRO-FIDUCIAL]  9.4,66.04 0 top
FID147  FIDUCIALUFIDUCIAL  [MICRO-FIDUCIAL]  17.02,66.07 0 bottom
FID148  FIDUCIALUFIDUCIAL  [MICRO-FIDUCIAL]  7.49,83.97 0 bottom
FID149  FIDUCIALUFIDUCIAL  [MICRO-FIDUCIAL]  32.77,84 0 top
FID150  FIDUCIALUFIDUCIAL  [MICRO-FIDUCIAL]  25.15,66.04 0 top
FID151  FIDUCIALUFIDUCIAL  [MICRO-FIDUCIAL]  32.77,66.07 0 bottom
FID152  FIDUCIALUFIDUCIAL  [MICRO-FIDUCIAL]  23.24,83.97 0 bottom
FID153  FIDUCIALUFIDUCIAL  [MICRO-FIDUCIAL]  48.51,84 0 top
FID154  FIDUCIALUFIDUCIAL  [MICRO-FIDUCIAL]  40.89,66.04 0 top
FID155  FIDUCIALUFIDUCIAL  [MICRO-FIDUCIAL]  48.51,66.07 0 bottom
FID156  FIDUCIALUFIDUCIAL  [MICRO-FIDUCIAL]  38.99,83.97 0 bottom
FID157  FIDUCIALUFIDUCIAL  [MICRO-FIDUCIAL]  64.26,84 0 top
FID158  FIDUCIALUFIDUCIAL  [MICRO-FIDUCIAL]  56.64,66.04 0 top
FID159  FIDUCIALUFIDUCIAL  [MICRO-FIDUCIAL]  64.26,66.07 0 bottom
FID160  FIDUCIALUFIDUCIAL  [MICRO-FIDUCIAL]  54.74,83.97 0 bottom
FID161  FIDUCIALUFIDUCIAL  [MICRO-FIDUCIAL]  80.01,84 0 top
FID162  FIDUCIALUFIDUCIAL  [MICRO-FIDUCIAL]  72.39,66.04 0 top
FID163  FIDUCIALUFIDUCIAL  [MICRO-FIDUCIAL]  80.01,66.07 0 bottom
FID164  FIDUCIALUFIDUCIAL  [MICRO-FIDUCIAL]  70.48,83.97 0 bottom
FID165  FIDUCIALUFIDUCIAL  [MICRO-FIDUCIAL]  95.76,84 0 top
FID166  FIDUCIALUFIDUCIAL  [MICRO-FIDUCIAL]  88.14,66.04 0 top
FID167  FIDUCIALUFIDUCIAL  [MICRO-FIDUCIAL]  95.76,66.07 0 bottom
FID168  FIDUCIALUFIDUCIAL  [MICRO-FIDUCIAL]  86.23,83.97 0 bottom
FID169  FIDUCIALUFIDUCIAL  [MICRO-FIDUCIAL]  111.51,84 0 top
FID170  FIDUCIALUFIDUCIAL  [MICRO-FIDUCIAL]  103.89,66.04 0 top
FID171  FIDUCIALUFIDUCIAL  [MICRO-FIDUCIAL]  111.51,66.07 0 bottom
FID172  FIDUCIALUFIDUCIAL  [MICRO-FIDUCIAL]  101.98,83.97 0 bottom
FID173  FIDUCIALUFIDUCIAL  [MICRO-FIDUCIAL]  127.25,84 0 top
FID174  FIDUCIALUFIDUCIAL  [MICRO-FIDUCIAL]  119.63,66.04 0 top
FID175  FIDUCIALUFIDUCIAL  [MICRO-FIDUCIAL]  127.25,66.07 0 bottom
FID176  FIDUCIALUFIDUCIAL  [MICRO-FIDUCIAL]  117.73,83.97 0 bottom
FID177  FIDUCIALUFIDUCIAL  [MICRO-FIDUCIAL]  143,84 0 top
FID178  FIDUCIALUFIDUCIAL  [MICRO-FIDUCIAL]  135.38,66.04 0 top
FID179  FIDUCIALUFIDUCIAL  [MICRO-FIDUCIAL]  143,66.07 0 bottom
FID180  FIDUCIALUFIDUCIAL  [MICRO-FIDUCIAL]  133.48,83.97 0 bottom
FID181  FIDUCIALUFIDUCIAL  [MICRO-FIDUCIAL]  158.75,84 0 top
FID182  FIDUCIALUFIDUCIAL  [MICRO-FIDUCIAL]  151.13,66.04 0 top
FID183  FIDUCIALUFIDUCIAL  [MICRO-FIDUCIAL]  158.75,66.07 0 bottom
FID184  FIDUCIALUFIDUCIAL  [MICRO-FIDUCIAL]  149.22,83.97 0 bottom
FID185  FIDUCIALUFIDUCIAL  [MICRO-FIDUCIAL]  174.5,84 0 top
FID186  FIDUCIALUFIDUCIAL  [MICRO-FIDUCIAL]  166.88,66.04 0 top
FID187  FIDUCIALUFIDUCIAL  [MICRO-FIDUCIAL]  174.5,66.07 0 bottom
FID188  FIDUCIALUFIDUCIAL  [MICRO-FIDUCIAL]  164.97,83.97 0 bottom
FID189  FIDUCIALUFIDUCIAL  [MICRO-FIDUCIAL]  190.25,84 0 top
FID190  FIDUCIALUFIDUCIAL  [MICRO-FIDUCIAL]  182.63,66.04 0 top
FID191  FIDUCIALUFIDUCIAL  [MICRO-FIDUCIAL]  190.25,66.07 0 bottom
FID192  FIDUCIALUFIDUCIAL  [MICRO-FIDUCIAL]  180.72,83.97 0 bottom
FID193  FIDUCIALUFIDUCIAL  [MICRO-FIDUCIAL]  17.02,103.56 0 top
FID194  FIDUCIALUFIDUCIAL  [MICRO-FIDUCIAL]  9.4,85.6 0 top
FID195  FIDUCIALUFIDUCIAL  [MICRO-FIDUCIAL]  17.02,85.62 0 bottom
FID196  FIDUCIALUFIDUCIAL  [MICRO-FIDUCIAL]  7.49,103.53 0 bottom
FID197  FIDUCIALUFIDUCIAL  [MICRO-FIDUCIAL]  32.77,103.56 0 top
FID198  FIDUCIALUFIDUCIAL  [MICRO-FIDUCIAL]  25.15,85.6 0 top
FID199  FIDUCIALUFIDUCIAL  [MICRO-FIDUCIAL]  32.77,85.62 0 bottom
FID200  FIDUCIALUFIDUCIAL  [MICRO-FIDUCIAL]  23.24,103.53 0 bottom
FID201  FIDUCIALUFIDUCIAL  [MICRO-FIDUCIAL]  48.51,103.56 0 top
FID202  FIDUCIALUFIDUCIAL  [MICRO-FIDUCIAL]  40.89,85.6 0 top
FID203  FIDUCIALUFIDUCIAL  [MICRO-FIDUCIAL]  48.51,85.62 0 bottom
FID204  FIDUCIALUFIDUCIAL  [MICRO-FIDUCIAL]  38.99,103.53 0 bottom
FID205  FIDUCIALUFIDUCIAL  [MICRO-FIDUCIAL]  64.26,103.56 0 top
FID206  FIDUCIALUFIDUCIAL  [MICRO-FIDUCIAL]  56.64,85.6 0 top
FID207  FIDUCIALUFIDUCIAL  [MICRO-FIDUCIAL]  64.26,85.62 0 bottom
FID208  FIDUCIALUFIDUCIAL  [MICRO-FIDUCIAL]  54.74,103.53 0 bottom
FID209  FIDUCIALUFIDUCIAL  [MICRO-FIDUCIAL]  80.01,103.56 0 top
FID210  FIDUCIALUFIDUCIAL  [MICRO-FIDUCIAL]  72.39,85.6 0 top
FID211  FIDUCIALUFIDUCIAL  [MICRO-FIDUCIAL]  80.01,85.62 0 bottom
FID212  FIDUCIALUFIDUCIAL  [MICRO-FIDUCIAL]  70.48,103.53 0 bottom
FID213  FIDUCIALUFIDUCIAL  [MICRO-FIDUCIAL]  95.76,103.56 0 top
FID214  FIDUCIALUFIDUCIAL  [MICRO-FIDUCIAL]  88.14,85.6 0 top
FID215  FIDUCIALUFIDUCIAL  [MICRO-FIDUCIAL]  95.76,85.62 0 bottom
FID216  FIDUCIALUFIDUCIAL  [MICRO-FIDUCIAL]  86.23,103.53 0 bottom
FID217  FIDUCIALUFIDUCIAL  [MICRO-FIDUCIAL]  111.51,103.56 0 top
FID218  FIDUCIALUFIDUCIAL  [MICRO-FIDUCIAL]  103.89,85.6 0 top
FID219  FIDUCIALUFIDUCIAL  [MICRO-FIDUCIAL]  111.51,85.62 0 bottom
FID220  FIDUCIALUFIDUCIAL  [MICRO-FIDUCIAL]  101.98,103.53 0 bottom
FID221  FIDUCIALUFIDUCIAL  [MICRO-FIDUCIAL]  127.25,103.56 0 top
FID222  FIDUCIALUFIDUCIAL  [MICRO-FIDUCIAL]  119.63,85.6 0 top
FID223  FIDUCIALUFIDUCIAL  [MICRO-FIDUCIAL]  127.25,85.62 0 bottom
FID224  FIDUCIALUFIDUCIAL  [MICRO-FIDUCIAL]  117.73,103.53 0 bottom
FID225  FIDUCIALUFIDUCIAL  [MICRO-FIDUCIAL]  143,103.56 0 top
FID226  FIDUCIALUFIDUCIAL  [MICRO-FIDUCIAL]  135.38,85.6 0 top
FID227  FIDUCIALUFIDUCIAL  [MICRO-FIDUCIAL]  143,85.62 0 bottom
FID228  FIDUCIALUFIDUCIAL  [MICRO-FIDUCIAL]  133.48,103.53 0 bottom
FID229  FIDUCIALUFIDUCIAL  [MICRO-FIDUCIAL]  158.75,103.56 0 top
FID230  FIDUCIALUFIDUCIAL  [MICRO-FIDUCIAL]  151.13,85.6 0 top
FID231  FIDUCIALUFIDUCIAL  [MICRO-FIDUCIAL]  158.75,85.62 0 bottom
FID232  FIDUCIALUFIDUCIAL  [MICRO-FIDUCIAL]  149.22,103.53 0 bottom
FID233  FIDUCIALUFIDUCIAL  [MICRO-FIDUCIAL]  174.5,103.56 0 top
FID234  FIDUCIALUFIDUCIAL  [MICRO-FIDUCIAL]  166.88,85.6 0 top
FID235  FIDUCIALUFIDUCIAL  [MICRO-FIDUCIAL]  174.5,85.62 0 bottom
FID236  FIDUCIALUFIDUCIAL  [MICRO-FIDUCIAL]  164.97,103.53 0 bottom
FID237  FIDUCIALUFIDUCIAL  [MICRO-FIDUCIAL]  190.25,103.56 0 top
FID238  FIDUCIALUFIDUCIAL  [MICRO-FIDUCIAL]  182.63,85.6 0 top
FID239  FIDUCIALUFIDUCIAL  [MICRO-FIDUCIAL]  190.25,85.62 0 bottom
FID240  FIDUCIALUFIDUCIAL  [MICRO-FIDUCIAL]  180.72,103.53 0 bottom
JP1  [1X06_NO_SILK]  36.58,8.13 180 top
JP2  [1X06_NO_SILK]  20.83,8.13 180 top
JP3  [1X06_NO_SILK]  52.32,8.13 180 top
JP4  [1X06_NO_SILK]  68.07,8.13 180 top
JP5  [1X06_NO_SILK]  83.82,8.13 180 top
JP6  [1X06_NO_SILK]  99.57,8.13 180 top
JP7  [1X06_NO_SILK]  115.32,8.13 180 top
JP8  [1X06_NO_SILK]  131.06,8.13 180 top
JP9  [1X06_NO_SILK]  146.81,8.13 180 top
JP10  [1X06_NO_SILK]  162.56,8.13 180 top
JP11  [1X06_NO_SILK]  178.31,8.13 180 top
JP12  [1X06_NO_SILK]  194.06,8.13 180 top
JP13  [1X06_NO_SILK]  20.83,27.69 180 top
JP14  [1X06_NO_SILK]  36.58,27.69 180 top
JP15  [1X06_NO_SILK]  52.32,27.69 180 top
JP16  [1X06_NO_SILK]  68.07,27.69 180 top
JP17  [1X06_NO_SILK]  83.82,27.69 180 top
JP18  [1X06_NO_SILK]  99.57,27.69 180 top
JP19  [1X06_NO_SILK]  115.32,27.69 180 top
JP20  [1X06_NO_SILK]  131.06,27.69 180 top
JP21  [1X06_NO_SILK]  146.81,27.69 180 top
JP22  [1X06_NO_SILK]  162.56,27.69 180 top
JP23  [1X06_NO_SILK]  178.31,27.69 180 top
JP24  [1X06_NO_SILK]  194.06,27.69 180 top
JP25  [1X06_NO_SILK]  20.83,47.24 180 top
JP26  [1X06_NO_SILK]  36.58,47.24 180 top
JP27  [1X06_NO_SILK]  52.32,47.24 180 top
JP28  [1X06_NO_SILK]  68.07,47.24 180 top
JP29  [1X06_NO_SILK]  83.82,47.24 180 top
JP30  [1X06_NO_SILK]  99.57,47.24 180 top
JP31  [1X06_NO_SILK]  115.32,47.24 180 top
JP32  [1X06_NO_SILK]  131.06,47.24 180 top
JP33  [1X06_NO_SILK]  146.81,47.24 180 top
JP34  [1X06_NO_SILK]  162.56,47.24 180 top
JP35  [1X06_NO_SILK]  178.31,47.24 180 top
JP36  [1X06_NO_SILK]  194.06,47.24 180 top
JP37  [1X06_NO_SILK]  20.83,66.8 180 top
JP38  [1X06_NO_SILK]  36.58,66.8 180 top
JP39  [1X06_NO_SILK]  52.32,66.8 180 top
JP40  [1X06_NO_SILK]  68.07,66.8 180 top
JP41  [1X06_NO_SILK]  83.82,66.8 180 top
JP42  [1X06_NO_SILK]  99.57,66.8 180 top
JP43  [1X06_NO_SILK]  115.32,66.8 180 top
JP44  [1X06_NO_SILK]  131.06,66.8 180 top
JP45  [1X06_NO_SILK]  146.81,66.8 180 top
JP46  [1X06_NO_SILK]  162.56,66.8 180 top
JP47  [1X06_NO_SILK]  178.31,66.8 180 top
JP48  [1X06_NO_SILK]  194.06,66.8 180 top
JP49  [1X06_NO_SILK]  20.83,86.36 180 top
JP50  [1X06_NO_SILK]  36.58,86.36 180 top
JP51  [1X06_NO_SILK]  52.32,86.36 180 top
JP52  [1X06_NO_SILK]  68.07,86.36 180 top
JP53  [1X06_NO_SILK]  83.82,86.36 180 top
JP54  [1X06_NO_SILK]  99.57,86.36 180 top
JP55  [1X06_NO_SILK]  115.32,86.36 180 top
JP56  [1X06_NO_SILK]  131.06,86.36 180 top
JP57  [1X06_NO_SILK]  146.81,86.36 180 top
JP58  [1X06_NO_SILK]  162.56,86.36 180 top
JP59  [1X06_NO_SILK]  178.31,86.36 180 top
JP60  [1X06_NO_SILK]  194.06,86.36 180 top
LOGO1  SFE_LOGO_FLAME.1_INCH  [SFE_LOGO_FLAME_.1]  8.51,10.29 0 top
LOGO2  OSHW-LOGOMINI  [OSHW-LOGO-MINI]  8.64,24.38 0 top
LOGO3  SFE_LOGO_FLAME.1_INCH  [SFE_LOGO_FLAME_.1]  24.26,10.29 0 top
LOGO4  OSHW-LOGOMINI  [OSHW-LOGO-MINI]  24.38,24.38 0 top
LOGO5  SFE_LOGO_FLAME.1_INCH  [SFE_LOGO_FLAME_.1]  40.01,10.29 0 top
LOGO6  OSHW-LOGOMINI  [OSHW-LOGO-MINI]  40.13,24.38 0 top
LOGO7  SFE_LOGO_FLAME.1_INCH  [SFE_LOGO_FLAME_.1]  55.75,10.29 0 top
LOGO8  OSHW-LOGOMINI  [OSHW-LOGO-MINI]  55.88,24.38 0 top
LOGO9  SFE_LOGO_FLAME.1_INCH  [SFE_LOGO_FLAME_.1]  71.5,10.29 0 top
LOGO10  OSHW-LOGOMINI  [OSHW-LOGO-MINI]  71.63,24.38 0 top
LOGO11  SFE_LOGO_FLAME.1_INCH  [SFE_LOGO_FLAME_.1]  87.25,10.29 0 top
LOGO12  OSHW-LOGOMINI  [OSHW-LOGO-MINI]  87.38,24.38 0 top
LOGO13  SFE_LOGO_FLAME.1_INCH  [SFE_LOGO_FLAME_.1]  103,10.29 0 top
LOGO14  OSHW-LOGOMINI  [OSHW-LOGO-MINI]  103.12,24.38 0 top
LOGO15  SFE_LOGO_FLAME.1_INCH  [SFE_LOGO_FLAME_.1]  118.75,10.29 0 top
LOGO16  OSHW-LOGOMINI  [OSHW-LOGO-MINI]  118.87,24.38 0 top
LOGO17  SFE_LOGO_FLAME.1_INCH  [SFE_LOGO_FLAME_.1]  134.49,10.29 0 top
LOGO18  OSHW-LOGOMINI  [OSHW-LOGO-MINI]  134.62,24.38 0 top
LOGO19  SFE_LOGO_FLAME.1_INCH  [SFE_LOGO_FLAME_.1]  150.24,10.29 0 top
LOGO20  OSHW-LOGOMINI  [OSHW-LOGO-MINI]  150.37,24.38 0 top
LOGO21  SFE_LOGO_FLAME.1_INCH  [SFE_LOGO_FLAME_.1]  165.99,10.29 0 top
LOGO22  OSHW-LOGOMINI  [OSHW-LOGO-MINI]  166.12,24.38 0 top
LOGO23  SFE_LOGO_FLAME.1_INCH  [SFE_LOGO_FLAME_.1]  181.74,10.29 0 top
LOGO24  OSHW-LOGOMINI  [OSHW-LOGO-MINI]  181.86,24.38 0 top
LOGO25  SFE_LOGO_FLAME.1_INCH  [SFE_LOGO_FLAME_.1]  8.51,29.84 0 top
LOGO26  OSHW-LOGOMINI  [OSHW-LOGO-MINI]  8.64,43.94 0 top
LOGO27  SFE_LOGO_FLAME.1_INCH  [SFE_LOGO_FLAME_.1]  24.26,29.84 0 top
LOGO28  OSHW-LOGOMINI  [OSHW-LOGO-MINI]  24.38,43.94 0 top
LOGO29  SFE_LOGO_FLAME.1_INCH  [SFE_LOGO_FLAME_.1]  40.01,29.84 0 top
LOGO30  OSHW-LOGOMINI  [OSHW-LOGO-MINI]  40.13,43.94 0 top
LOGO31  SFE_LOGO_FLAME.1_INCH  [SFE_LOGO_FLAME_.1]  55.75,29.84 0 top
LOGO32  OSHW-LOGOMINI  [OSHW-LOGO-MINI]  55.88,43.94 0 top
LOGO33  SFE_LOGO_FLAME.1_INCH  [SFE_LOGO_FLAME_.1]  71.5,29.84 0 top
LOGO34  OSHW-LOGOMINI  [OSHW-LOGO-MINI]  71.63,43.94 0 top
LOGO35  SFE_LOGO_FLAME.1_INCH  [SFE_LOGO_FLAME_.1]  87.25,29.84 0 top
LOGO36  OSHW-LOGOMINI  [OSHW-LOGO-MINI]  87.38,43.94 0 top
LOGO37  SFE_LOGO_FLAME.1_INCH  [SFE_LOGO_FLAME_.1]  103,29.84 0 top
LOGO38  OSHW-LOGOMINI  [OSHW-LOGO-MINI]  103.12,43.94 0 top
LOGO39  SFE_LOGO_FLAME.1_INCH  [SFE_LOGO_FLAME_.1]  118.75,29.84 0 top
LOGO40  OSHW-LOGOMINI  [OSHW-LOGO-MINI]  118.87,43.94 0 top
LOGO41  SFE_LOGO_FLAME.1_INCH  [SFE_LOGO_FLAME_.1]  134.49,29.84 0 top
LOGO42  OSHW-LOGOMINI  [OSHW-LOGO-MINI]  134.62,43.94 0 top
LOGO43  SFE_LOGO_FLAME.1_INCH  [SFE_LOGO_FLAME_.1]  150.24,29.84 0 top
LOGO44  OSHW-LOGOMINI  [OSHW-LOGO-MINI]  150.37,43.94 0 top
LOGO45  SFE_LOGO_FLAME.1_INCH  [SFE_LOGO_FLAME_.1]  165.99,29.84 0 top
LOGO46  OSHW-LOGOMINI  [OSHW-LOGO-MINI]  166.12,43.94 0 top
LOGO47  SFE_LOGO_FLAME.1_INCH  [SFE_LOGO_FLAME_.1]  181.74,29.84 0 top
LOGO48  OSHW-LOGOMINI  [OSHW-LOGO-MINI]  181.86,43.94 0 top
LOGO49  SFE_LOGO_FLAME.1_INCH  [SFE_LOGO_FLAME_.1]  8.51,49.4 0 top
LOGO50  OSHW-LOGOMINI  [OSHW-LOGO-MINI]  8.64,63.5 0 top
LOGO51  SFE_LOGO_FLAME.1_INCH  [SFE_LOGO_FLAME_.1]  24.26,49.4 0 top
LOGO52  OSHW-LOGOMINI  [OSHW-LOGO-MINI]  24.38,63.5 0 top
LOGO53  SFE_LOGO_FLAME.1_INCH  [SFE_LOGO_FLAME_.1]  40.01,49.4 0 top
LOGO54  OSHW-LOGOMINI  [OSHW-LOGO-MINI]  40.13,63.5 0 top
LOGO55  SFE_LOGO_FLAME.1_INCH  [SFE_LOGO_FLAME_.1]  55.75,49.4 0 top
LOGO56  OSHW-LOGOMINI  [OSHW-LOGO-MINI]  55.88,63.5 0 top
LOGO57  SFE_LOGO_FLAME.1_INCH  [SFE_LOGO_FLAME_.1]  71.5,49.4 0 top
LOGO58  OSHW-LOGOMINI  [OSHW-LOGO-MINI]  71.63,63.5 0 top
LOGO59  SFE_LOGO_FLAME.1_INCH  [SFE_LOGO_FLAME_.1]  87.25,49.4 0 top
LOGO60  OSHW-LOGOMINI  [OSHW-LOGO-MINI]  87.38,63.5 0 top
LOGO61  SFE_LOGO_FLAME.1_INCH  [SFE_LOGO_FLAME_.1]  103,49.4 0 top
LOGO62  OSHW-LOGOMINI  [OSHW-LOGO-MINI]  103.12,63.5 0 top
LOGO63  SFE_LOGO_FLAME.1_INCH  [SFE_LOGO_FLAME_.1]  118.75,49.4 0 top
LOGO64  OSHW-LOGOMINI  [OSHW-LOGO-MINI]  118.87,63.5 0 top
LOGO65  SFE_LOGO_FLAME.1_INCH  [SFE_LOGO_FLAME_.1]  134.49,49.4 0 top
LOGO66  OSHW-LOGOMINI  [OSHW-LOGO-MINI]  134.62,63.5 0 top
LOGO67  SFE_LOGO_FLAME.1_INCH  [SFE_LOGO_FLAME_.1]  150.24,49.4 0 top
LOGO68  OSHW-LOGOMINI  [OSHW-LOGO-MINI]  150.37,63.5 0 top
LOGO69  SFE_LOGO_FLAME.1_INCH  [SFE_LOGO_FLAME_.1]  165.99,49.4 0 top
LOGO70  OSHW-LOGOMINI  [OSHW-LOGO-MINI]  166.12,63.5 0 top
LOGO71  SFE_LOGO_FLAME.1_INCH  [SFE_LOGO_FLAME_.1]  181.74,49.4 0 top
LOGO72  OSHW-LOGOMINI  [OSHW-LOGO-MINI]  181.86,63.5 0 top
LOGO73  SFE_LOGO_FLAME.1_INCH  [SFE_LOGO_FLAME_.1]  8.51,68.96 0 top
LOGO74  OSHW-LOGOMINI  [OSHW-LOGO-MINI]  8.64,83.06 0 top
LOGO75  SFE_LOGO_FLAME.1_INCH  [SFE_LOGO_FLAME_.1]  24.26,68.96 0 top
LOGO76  OSHW-LOGOMINI  [OSHW-LOGO-MINI]  24.38,83.06 0 top
LOGO77  SFE_LOGO_FLAME.1_INCH  [SFE_LOGO_FLAME_.1]  40.01,68.96 0 top
LOGO78  OSHW-LOGOMINI  [OSHW-LOGO-MINI]  40.13,83.06 0 top
LOGO79  SFE_LOGO_FLAME.1_INCH  [SFE_LOGO_FLAME_.1]  55.75,68.96 0 top
LOGO80  OSHW-LOGOMINI  [OSHW-LOGO-MINI]  55.88,83.06 0 top
LOGO81  SFE_LOGO_FLAME.1_INCH  [SFE_LOGO_FLAME_.1]  71.5,68.96 0 top
LOGO82  OSHW-LOGOMINI  [OSHW-LOGO-MINI]  71.63,83.06 0 top
LOGO83  SFE_LOGO_FLAME.1_INCH  [SFE_LOGO_FLAME_.1]  87.25,68.96 0 top
LOGO84  OSHW-LOGOMINI  [OSHW-LOGO-MINI]  87.38,83.06 0 top
LOGO85  SFE_LOGO_FLAME.1_INCH  [SFE_LOGO_FLAME_.1]  103,68.96 0 top
LOGO86  OSHW-LOGOMINI  [OSHW-LOGO-MINI]  103.12,83.06 0 top
LOGO87  SFE_LOGO_FLAME.1_INCH  [SFE_LOGO_FLAME_.1]  118.75,68.96 0 top
LOGO88  OSHW-LOGOMINI  [OSHW-LOGO-MINI]  118.87,83.06 0 top
LOGO89  SFE_LOGO_FLAME.1_INCH  [SFE_LOGO_FLAME_.1]  134.49,68.96 0 top
LOGO90  OSHW-LOGOMINI  [OSHW-LOGO-MINI]  134.62,83.06 0 top
LOGO91  SFE_LOGO_FLAME.1_INCH  [SFE_LOGO_FLAME_.1]  150.24,68.96 0 top
LOGO92  OSHW-LOGOMINI  [OSHW-LOGO-MINI]  150.37,83.06 0 top
LOGO93  SFE_LOGO_FLAME.1_INCH  [SFE_LOGO_FLAME_.1]  165.99,68.96 0 top
LOGO94  OSHW-LOGOMINI  [OSHW-LOGO-MINI]  166.12,83.06 0 top
LOGO95  SFE_LOGO_FLAME.1_INCH  [SFE_LOGO_FLAME_.1]  181.74,68.96 0 top
LOGO96  OSHW-LOGOMINI  [OSHW-LOGO-MINI]  181.86,83.06 0 top
LOGO97  SFE_LOGO_FLAME.1_INCH  [SFE_LOGO_FLAME_.1]  8.51,88.52 0 top
LOGO98  OSHW-LOGOMINI  [OSHW-LOGO-MINI]  8.64,102.62 0 top
LOGO99  SFE_LOGO_FLAME.1_INCH  [SFE_LOGO_FLAME_.1]  24.26,88.52 0 top
LOGO100  OSHW-LOGOMINI  [OSHW-LOGO-MINI]  24.38,102.62 0 top
LOGO101  SFE_LOGO_FLAME.1_INCH  [SFE_LOGO_FLAME_.1]  40.01,88.52 0 top
LOGO102  OSHW-LOGOMINI  [OSHW-LOGO-MINI]  40.13,102.62 0 top
LOGO103  SFE_LOGO_FLAME.1_INCH  [SFE_LOGO_FLAME_.1]  55.75,88.52 0 top
LOGO104  OSHW-LOGOMINI  [OSHW-LOGO-MINI]  55.88,102.62 0 top
LOGO105  SFE_LOGO_FLAME.1_INCH  [SFE_LOGO_FLAME_.1]  71.5,88.52 0 top
LOGO106  OSHW-LOGOMINI  [OSHW-LOGO-MINI]  71.63,102.62 0 top
LOGO107  SFE_LOGO_FLAME.1_INCH  [SFE_LOGO_FLAME_.1]  87.25,88.52 0 top
LOGO108  OSHW-LOGOMINI  [OSHW-LOGO-MINI]  87.38,102.62 0 top
LOGO109  SFE_LOGO_FLAME.1_INCH  [SFE_LOGO_FLAME_.1]  103,88.52 0 top
LOGO110  OSHW-LOGOMINI  [OSHW-LOGO-MINI]  103.12,102.62 0 top
LOGO111  SFE_LOGO_FLAME.1_INCH  [SFE_LOGO_FLAME_.1]  118.75,88.52 0 top
LOGO112  OSHW-LOGOMINI  [OSHW-LOGO-MINI]  118.87,102.62 0 top
LOGO113  SFE_LOGO_FLAME.1_INCH  [SFE_LOGO_FLAME_.1]  134.49,88.52 0 top
LOGO114  OSHW-LOGOMINI  [OSHW-LOGO-MINI]  134.62,102.62 0 top
LOGO115  SFE_LOGO_FLAME.1_INCH  [SFE_LOGO_FLAME_.1]  150.24,88.52 0 top
LOGO116  OSHW-LOGOMINI  [OSHW-LOGO-MINI]  150.37,102.62 0 top
LOGO117  SFE_LOGO_FLAME.1_INCH  [SFE_LOGO_FLAME_.1]  165.99,88.52 0 top
LOGO118  OSHW-LOGOMINI  [OSHW-LOGO-MINI]  166.12,102.62 0 top
LOGO119  SFE_LOGO_FLAME.1_INCH  [SFE_LOGO_FLAME_.1]  181.74,88.52 0 top
LOGO120  OSHW-LOGOMINI  [OSHW-LOGO-MINI]  181.86,102.62 0 top
Q1  16MHZ  [RESONATOR-SMD]  20.67,18.75 270 top
Q2  16MHZ  [RESONATOR-SMD]  36.41,18.75 270 top
Q3  16MHZ  [RESONATOR-SMD]  52.16,18.75 270 top
Q4  16MHZ  [RESONATOR-SMD]  67.91,18.75 270 top
Q5  16MHZ  [RESONATOR-SMD]  83.66,18.75 270 top
Q6  16MHZ  [RESONATOR-SMD]  99.41,18.75 270 top
Q7  16MHZ  [RESONATOR-SMD]  115.15,18.75 270 top
Q8  16MHZ  [RESONATOR-SMD]  130.9,18.75 270 top
Q9  16MHZ  [RESONATOR-SMD]  146.65,18.75 270 top
Q10  16MHZ  [RESONATOR-SMD]  162.4,18.75 270 top
Q11  16MHZ  [RESONATOR-SMD]  178.15,18.75 270 top
Q12  16MHZ  [RESONATOR-SMD]  193.89,18.75 270 top
Q13  16MHZ  [RESONATOR-SMD]  20.67,38.31 270 top
Q14  16MHZ  [RESONATOR-SMD]  36.41,38.31 270 top
Q15  16MHZ  [RESONATOR-SMD]  52.16,38.31 270 top
Q16  16MHZ  [RESONATOR-SMD]  67.91,38.31 270 top
Q17  16MHZ  [RESONATOR-SMD]  83.66,38.31 270 top
Q18  16MHZ  [RESONATOR-SMD]  99.41,38.31 270 top
Q19  16MHZ  [RESONATOR-SMD]  115.15,38.31 270 top
Q20  16MHZ  [RESONATOR-SMD]  130.9,38.31 270 top
Q21  16MHZ  [RESONATOR-SMD]  146.65,38.31 270 top
Q22  16MHZ  [RESONATOR-SMD]  162.4,38.31 270 top
Q23  16MHZ  [RESONATOR-SMD]  178.15,38.31 270 top
Q24  16MHZ  [RESONATOR-SMD]  193.89,38.31 270 top
Q25  16MHZ  [RESONATOR-SMD]  20.67,57.87 270 top
Q26  16MHZ  [RESONATOR-SMD]  36.41,57.87 270 top
Q27  16MHZ  [RESONATOR-SMD]  52.16,57.87 270 top
Q28  16MHZ  [RESONATOR-SMD]  67.91,57.87 270 top
Q29  16MHZ  [RESONATOR-SMD]  83.66,57.87 270 top
Q30  16MHZ  [RESONATOR-SMD]  99.41,57.87 270 top
Q31  16MHZ  [RESONATOR-SMD]  115.15,57.87 270 top
Q32  16MHZ  [RESONATOR-SMD]  130.9,57.87 270 top
Q33  16MHZ  [RESONATOR-SMD]  146.65,57.87 270 top
Q34  16MHZ  [RESONATOR-SMD]  162.4,57.87 270 top
Q35  16MHZ  [RESONATOR-SMD]  178.15,57.87 270 top
Q36  16MHZ  [RESONATOR-SMD]  193.89,57.87 270 top
Q37  16MHZ  [RESONATOR-SMD]  20.67,77.43 270 top
Q38  16MHZ  [RESONATOR-SMD]  36.41,77.43 270 top
Q39  16MHZ  [RESONATOR-SMD]  52.16,77.43 270 top
Q40  16MHZ  [RESONATOR-SMD]  67.91,77.43 270 top
Q41  16MHZ  [RESONATOR-SMD]  83.66,77.43 270 top
Q42  16MHZ  [RESONATOR-SMD]  99.41,77.43 270 top
Q43  16MHZ  [RESONATOR-SMD]  115.15,77.43 270 top
Q44  16MHZ  [RESONATOR-SMD]  130.9,77.43 270 top
Q45  16MHZ  [RESONATOR-SMD]  146.65,77.43 270 top
Q46  16MHZ  [RESONATOR-SMD]  162.4,77.43 270 top
Q47  16MHZ  [RESONATOR-SMD]  178.15,77.43 270 top
Q48  16MHZ  [RESONATOR-SMD]  193.89,77.43 270 top
Q49  16MHZ  [RESONATOR-SMD]  20.67,96.98 270 top
Q50  16MHZ  [RESONATOR-SMD]  36.41,96.98 270 top
Q51  16MHZ  [RESONATOR-SMD]  52.16,96.98 270 top
Q52  16MHZ  [RESONATOR-SMD]  67.91,96.98 270 top
Q53  16MHZ  [RESONATOR-SMD]  83.66,96.98 270 top
Q54  16MHZ  [RESONATOR-SMD]  99.41,96.98 270 top
Q55  16MHZ  [RESONATOR-SMD]  115.15,96.98 270 top
Q56  16MHZ  [RESONATOR-SMD]  130.9,96.98 270 top
Q57  16MHZ  [RESONATOR-SMD]  146.65,96.98 270 top
Q58  16MHZ  [RESONATOR-SMD]  162.4,96.98 270 top
Q59  16MHZ  [RESONATOR-SMD]  178.15,96.98 270 top
Q60  16MHZ  [RESONATOR-SMD]  193.89,96.98 270 top
R1  1K  [0603-RES]  20.24,21.37 0 top
R2  10K  [0603-RES]  8.13,15.11 90 top
R3  10K  [0603-RES]  23.88,15.11 90 top
R4  1K  [0603-RES]  24.45,21.31 180 top
R5  1K  [0603-RES]  35.99,21.37 0 top
R6  1K  [0603-RES]  8.7,21.31 180 top
R7  10K  [0603-RES]  39.62,15.11 90 top
R8  1K  [0603-RES]  40.2,21.31 180 top
R9  1K  [0603-RES]  51.74,21.37 0 top
R10  10K  [0603-RES]  55.37,15.11 90 top
R11  1K  [0603-RES]  55.95,21.31 180 top
R12  1K  [0603-RES]  67.49,21.37 0 top
R13  10K  [0603-RES]  71.12,15.11 90 top
R14  1K  [0603-RES]  71.69,21.31 180 top
R15  1K  [0603-RES]  83.23,21.37 0 top
R16  10K  [0603-RES]  86.87,15.11 90 top
R17  1K  [0603-RES]  87.44,21.31 180 top
R18  1K  [0603-RES]  98.98,21.37 0 top
R19  10K  [0603-RES]  102.62,15.11 90 top
R20  1K  [0603-RES]  103.19,21.31 180 top
R21  1K  [0603-RES]  114.73,21.37 0 top
R22  10K  [0603-RES]  118.36,15.11 90 top
R23  1K  [0603-RES]  118.94,21.31 180 top
R24  1K  [0603-RES]  130.48,21.37 0 top
R25  10K  [0603-RES]  134.11,15.11 90 top
R26  1K  [0603-RES]  134.69,21.31 180 top
R27  1K  [0603-RES]  146.23,21.37 0 top
R28  10K  [0603-RES]  149.86,15.11 90 top
R29  1K  [0603-RES]  150.43,21.31 180 top
R30  1K  [0603-RES]  161.97,21.37 0 top
R31  10K  [0603-RES]  165.61,15.11 90 top
R32  1K  [0603-RES]  166.18,21.31 180 top
R33  1K  [0603-RES]  177.72,21.37 0 top
R34  10K  [0603-RES]  181.36,15.11 90 top
R35  1K  [0603-RES]  181.93,21.31 180 top
R36  1K  [0603-RES]  193.47,21.37 0 top
R37  10K  [0603-RES]  8.13,34.67 90 top
R38  1K  [0603-RES]  8.7,40.87 180 top
R39  1K  [0603-RES]  20.24,40.93 0 top
R40  10K  [0603-RES]  23.88,34.67 90 top
R41  1K  [0603-RES]  24.45,40.87 180 top
R42  1K  [0603-RES]  35.99,40.93 0 top
R43  10K  [0603-RES]  39.62,34.67 90 top
R44  1K  [0603-RES]  40.2,40.87 180 top
R45  1K  [0603-RES]  51.74,40.93 0 top
R46  10K  [0603-RES]  55.37,34.67 90 top
R47  1K  [0603-RES]  55.95,40.87 180 top
R48  1K  [0603-RES]  67.49,40.93 0 top
R49  10K  [0603-RES]  71.12,34.67 90 top
R50  1K  [0603-RES]  71.69,40.87 180 top
R51  1K  [0603-RES]  83.23,40.93 0 top
R52  10K  [0603-RES]  86.87,34.67 90 top
R53  1K  [0603-RES]  87.44,40.87 180 top
R54  1K  [0603-RES]  98.98,40.93 0 top
R55  10K  [0603-RES]  102.62,34.67 90 top
R56  1K  [0603-RES]  103.19,40.87 180 top
R57  1K  [0603-RES]  114.73,40.93 0 top
R58  10K  [0603-RES]  118.36,34.67 90 top
R59  1K  [0603-RES]  118.94,40.87 180 top
R60  1K  [0603-RES]  130.48,40.93 0 top
R61  10K  [0603-RES]  134.11,34.67 90 top
R62  1K  [0603-RES]  134.69,40.87 180 top
R63  1K  [0603-RES]  146.23,40.93 0 top
R64  10K  [0603-RES]  149.86,34.67 90 top
R65  1K  [0603-RES]  150.43,40.87 180 top
R66  1K  [0603-RES]  161.97,40.93 0 top
R67  10K  [0603-RES]  165.61,34.67 90 top
R68  1K  [0603-RES]  166.18,40.87 180 top
R69  1K  [0603-RES]  177.72,40.93 0 top
R70  10K  [0603-RES]  181.36,34.67 90 top